# Altium PCB PCB1.PcbDoc
Units mm, origin at the board's own origin, x right, y up, seen from the top; angles counter-clockwise.
Board outline 152.4 x 101.6 mm, 2 copper layers (Top Layer, Bottom Layer); 31 components, 0 nets, 171 pads, 0 vias.
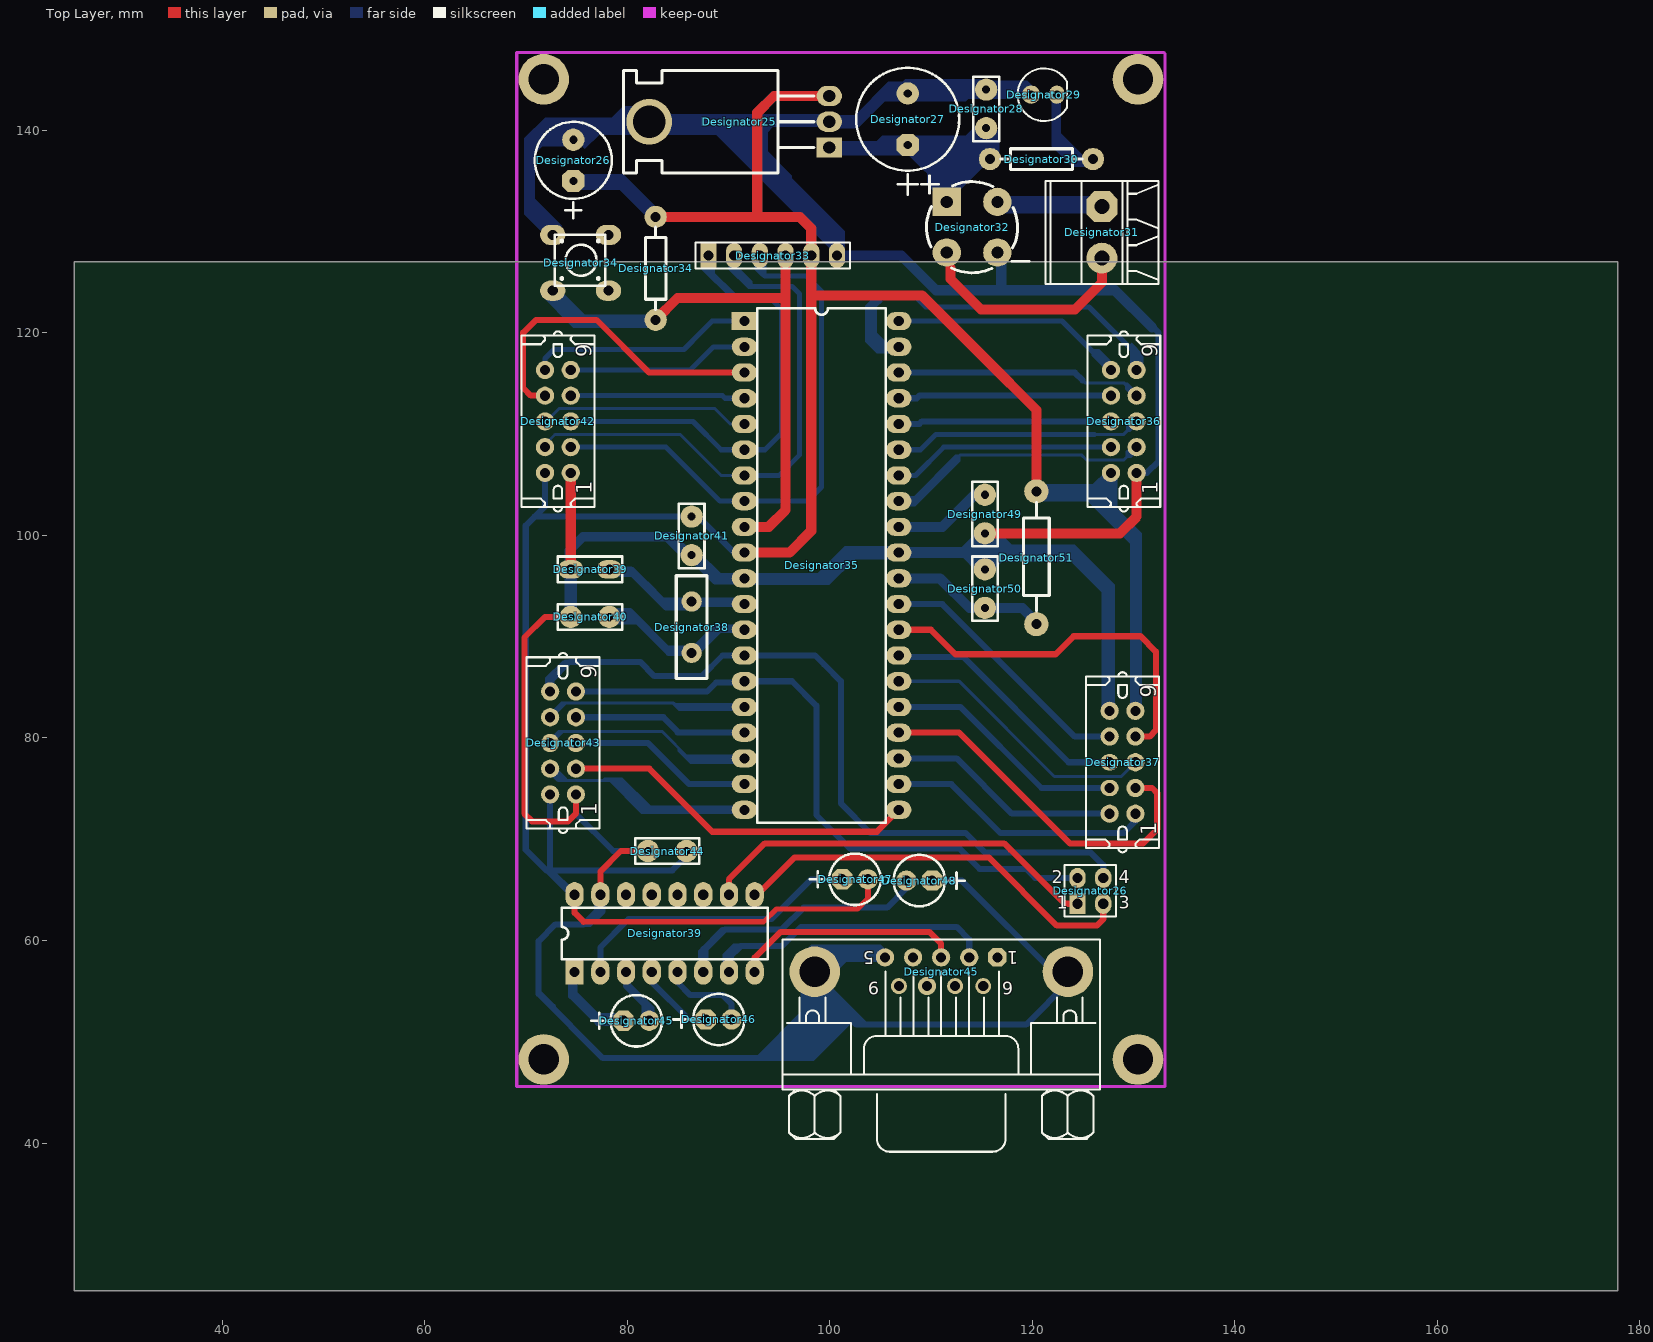
[diagram p0: Top Layer view]
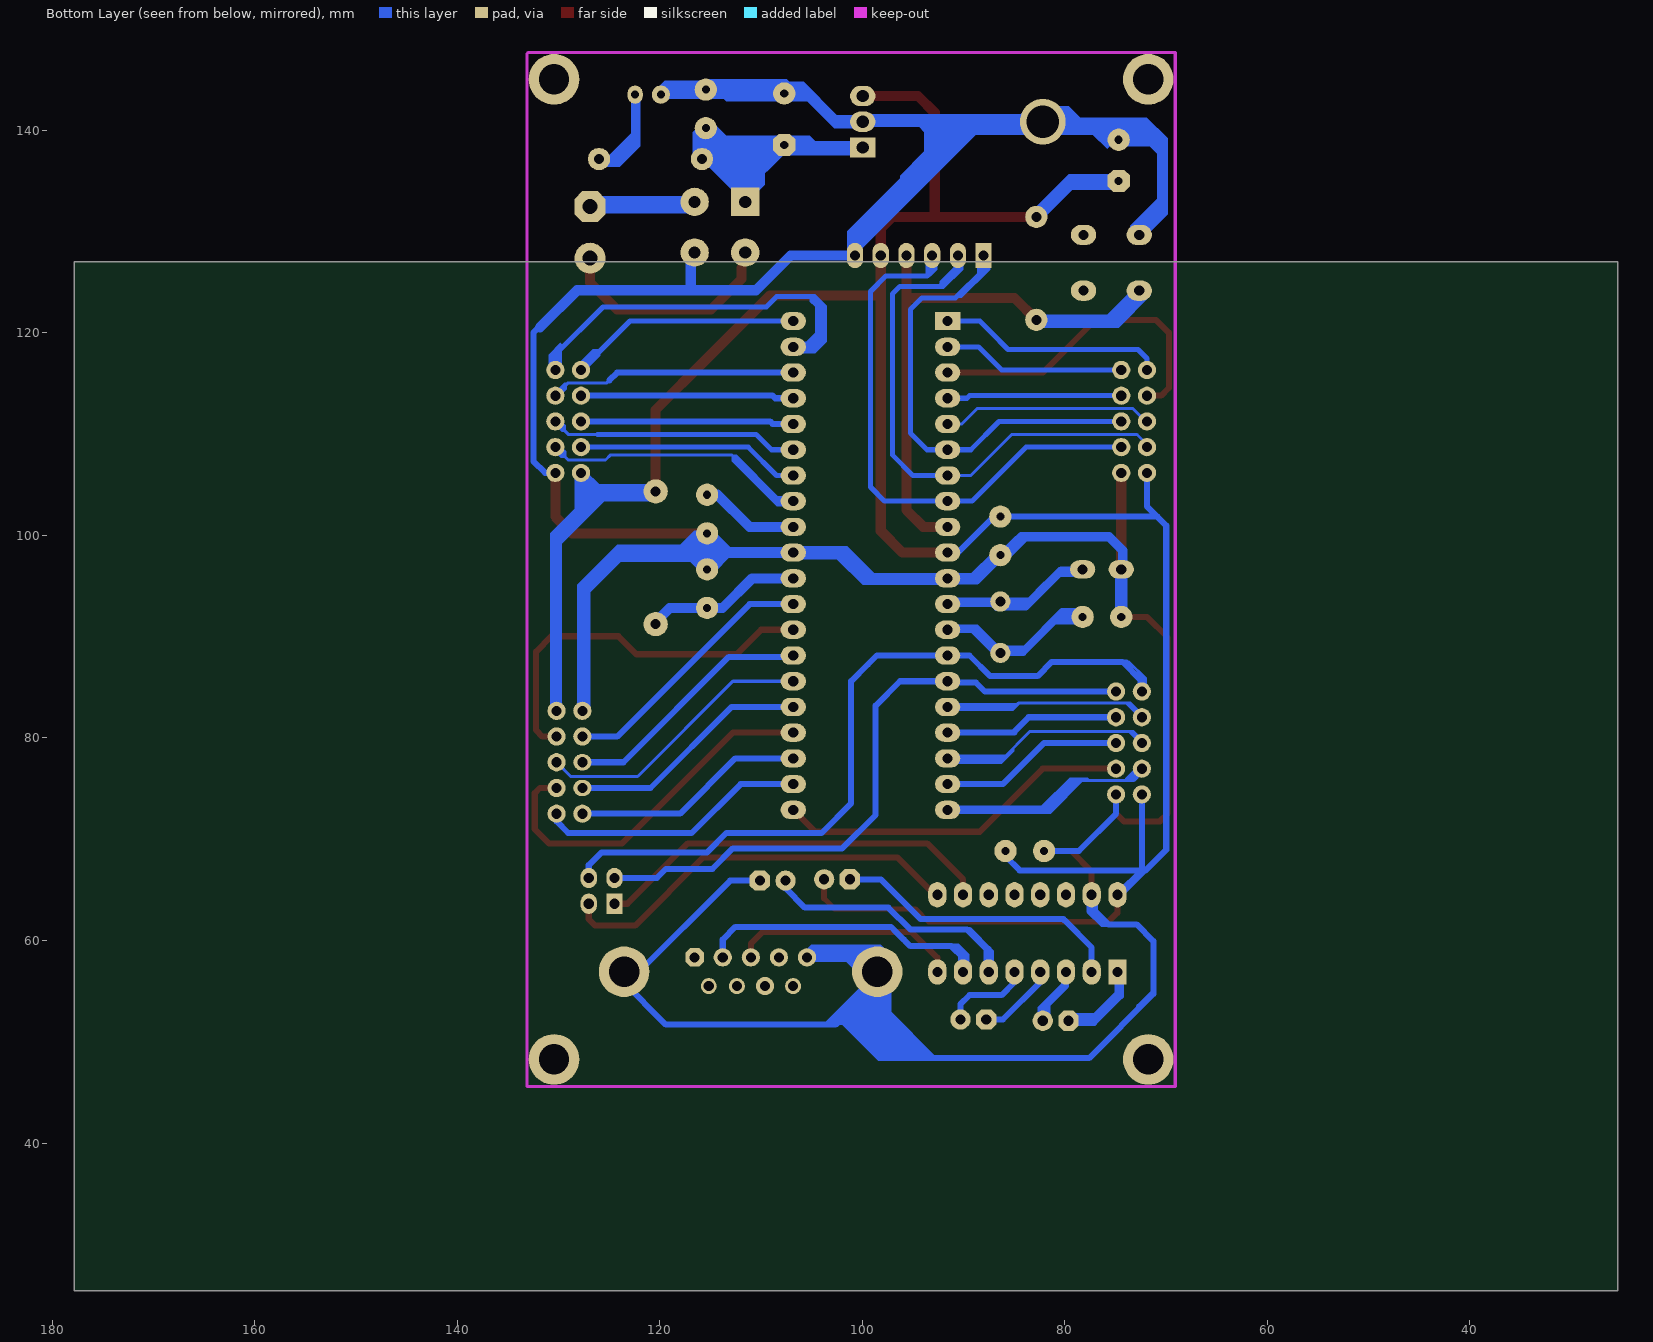
[diagram p1: Bottom Layer view, seen from below]

## Layer stack, top to bottom
Top Layer: signal copper 0.0356
Dielectric: dielectric 0.32, FR-4, Dk 4.8
Bottom Layer: signal copper 0.0356

## Board outline
25.4,25.4 177.8,25.4 177.8,127 25.4,127

## Design rules (kind name [scope] priority, off if disabled: settings)
Clearance [All] p1: gap=0.254
PolygonConnect [All] p1: connectstyle=Relief reliefconductorwidth=0.254 reliefentries=4 polygonreliefangle="90 Angle"
RoutingVias [All] p1: holewidth=0.711 width=1.27 viastyle="Through Hole" minholewidth=0.711 minwidth=1.27 maxholewidth=0.711 maxwidth=1.27
SilkscreenOverComponentPads SilkToSolderMaskClearance [IsPad] p1: minsilkscreentomaskgap=0.254
SolderMaskExpansion [All] p1: expansion=0.102
Width [All] p1: maxlimit=0.254 minlimit=0.254 preferedwidth=0.254
27 further rules are at their usual default settings.

## Components (designator, comment, footprint, x,y, rotation, side; value= is the part's Value field where it differs from the comment)
Designator25 "Comment" TO220HB 91.059,140.843 r90 top
Designator26 "Comment" RB.2/.3 74.676,137.033 r270 top
Designator26 "Comment" HDR2X2 124.46,63.627 r0 top
Designator27 "Comment" RB.2/.4 107.696,141.097 r270 top
Designator28 "Comment" RAD0.15#1 115.443,142.113 r270 top
Designator29 "Comment" LED-3 121.158,143.51 r0 top
Designator30 "Comment" AXIAL0.4 120.904,137.16 r0 top
Designator31 "Comment" MKDS3_2RMI 126.873,129.921 r270 top
Designator32 "Comment" BRIDGE-1 114.046,130.429 r0 top
Designator33 "Comment" HDR1X6 88.011,127.635 r0 top
Designator34 "Comment" sw4 72.644,129.667 r0 top
Designator34 "Comment" AXIAL0.4 82.804,126.365 r90 top
Designator35 "Comment" DIP40E 91.567,121.158 r0 top
Designator36 "Comment" BKLEV10#1 129.032,111.252 r90 top
Designator37 "Comment" BKLEV10#2 128.905,77.597 r90 top
Designator38 "Comment" XTAL1 86.36,88.392 r90 top
Designator39 "Comment" dip16e 74.803,56.896 r90 top
Designator39 "Comment" RAD0.15#2 76.327,96.647 r0 top
Designator40 "Comment" RAD0.15#1 76.327,91.948 r0 top
Designator41 "Comment" RAD0.15#1 86.36,99.949 r90 top
Designator42 "Comment" BKLEV10#1 73.152,111.252 r90 top
Designator43 "Comment" BKLEV10#1 73.66,79.502 r90 top
Designator44 "Comment" RAD0.15#1 83.947,68.834 r0 top
Designator45 "Comment" DB9FLW 116.544,58.335 r180 top
Designator45 "Comment" RB.1/.2 80.899,52.07 r180 top
Designator46 "Comment" RB.1/.2 89.027,52.197 r180 top
Designator47 "Comment" RB.1/.2 102.489,66.04 r180 top
Designator48 "Comment" RB.1/.2 108.839,65.913 r0 top
Designator49 "Comment" RAD0.15#1 115.316,102.108 r90 top
Designator50 "Comment" RAD0.15#1 115.316,94.742 r90 top
Designator51 "Comment" AXIAL0.5 120.396,97.79 r90 top

## Footprints (in the part's own frame and the unit in brackets; to place one, negate y for a bottom-side part, rotate by r counter-clockwise, add the part's x,y. Pads: shape width x height; smd on the part's side, far side on the other; paste and mask are expansions set on the pad)
AXIAL0.4 [mm]
  round 2.2 hole 1: 1(-5.08,0) 2(5.08,0)
  silkscreen extent -4.06,-1.02 4.06,1.02
AXIAL0.5 [mm]
  round 2.4 hole 1: 1(-6.55,0) 2(6.55,0)
  silkscreen extent -5.23,-1.27 5.43,1.27
BKLEV10#1 [mm]
  round 1.8 hole 1: 1(-5.08,-1.27) 2(-5.08,1.27) 3(-2.54,-1.27) 4(-2.54,1.27) 5(0,-1.27) 6(0,1.27) 7(2.54,-1.27) 8(2.54,1.27) 9(5.08,-1.27) 10(5.08,1.27)
  silkscreen extent -8.89,-3.6 8.89,3.6
BKLEV10#2 [mm]
  round 1.8 hole 1: 1(-5.08,-1.27) 2(-5.08,1.27) 3(-2.54,-1.27) 5(0,-1.27) 7(2.54,-1.27) 8(2.54,1.27) 9(5.08,-1.27) 10(5.08,1.27)
  oval 1.6x1.8 hole 1: 4(-2.54,1.27) 6(0,1.27)
  silkscreen extent -8.89,-3.6 8.89,3.6
BRIDGE-1 [mm] "created by: M.Hariri (designer)"
  round 2.8 hole 1.2: 1(2.5,-2.5) 2(-2.5,-2.5) 4(2.5,2.5)
  rect 2.8x2.8 hole 1.2: 3(-2.5,2.5)
  silkscreen extent -5,-4.5 5.64,5.07
DB9FLW [mm]
  oct 1.8x1.8 hole 1: 1(0,0)
  round 1.8 hole 1: 2(2.773,0) 3(5.546,0) 4(8.318,0) 5(11.091,0) 8(6.943,2.836)
  round 1.575 hole 1: 6(1.397,2.836) 7(4.17,2.836) 9(9.715,2.836)
  round 4.995 hole 3.006: BO1(-6.964,1.418) BO2(18.034,1.418)
  silkscreen extent -10.12,-1.76 21.21,19.2
dip16e [mm]
  rect 2.5x1.8 hole 1: 1(0,0)
  oval 2.5x1.8 hole 1: 2(0,-2.54) 3(0,-5.08) 4(0,-7.62) 5(0,-10.16) 6(0,-12.7) 7(0,-15.24) 8(0,-17.78) 9(7.62,-17.78) 10(7.62,-15.24) 11(7.62,-12.7) 12(7.62,-10.16) 13(7.62,-7.62) 14(7.62,-5.08) 15(7.62,-2.54) 16(7.62,0)
  silkscreen extent 1.27,-19.05 6.35,1.27
DIP40E [mm]
  rect 2.5x1.8 hole 1: 1(0,0)
  oval 2.5x1.8 hole 1: 2(0,-2.54) 3(0,-5.08) 4(0,-7.62) 5(0,-10.16) 6(0,-12.7) 7(0,-15.24) 8(0,-17.78) 9(0,-20.32) 10(0,-22.86) 11(0,-25.4) 12(0,-27.94) 13(0,-30.48) 14(0,-33.02) 15(0,-35.56) 16(0,-38.1) 17(0,-40.64) 18(0,-43.18) 19(0,-45.72) 20(0,-48.26) 21(15.24,-48.26) 22(15.24,-45.72) 23(15.24,-43.18) 24(15.24,-40.64) 25(15.24,-38.1) 26(15.24,-35.56) 27(15.24,-33.02) 28(15.24,-30.48) 29(15.24,-27.94) 30(15.24,-25.4) 31(15.24,-22.86) 32(15.24,-20.32) 33(15.24,-17.78) 34(15.24,-15.24) 35(15.24,-12.7) 36(15.24,-10.16) 37(15.24,-7.62) 38(15.24,-5.08) 39(15.24,-2.54) 40(15.24,0)
  silkscreen extent 1.27,-49.53 13.97,1.27
HDR1X6 [mm] "Connector; Header; 6 Position"
  rect 1.6x2.5 hole 1: 1(0,0)
  oval 1.6x2.5 hole 1: 2(2.54,0) 3(5.08,0) 4(7.62,0) 5(10.16,0) 6(12.7,0)
  silkscreen extent -1.27,-1.27 13.97,1.27
HDR2X2 [mm] "Connector; Header; 2x2 Position"
  rect 1.6x2 hole 1: 1(0,0)
  oval 1.6x2 hole 1: 2(0,2.54) 3(2.54,0) 4(2.54,2.54)
  silkscreen extent -1.27,-1.27 3.81,3.81
LED-3 [mm]
  round 1.8 hole 0.8: A(-1.279,0.009)
  oval 1.5x1.8 hole 0.8: K(1.261,0.009)
  silkscreen extent -2.61,-2.59 2.24,2.61
MKDS3_2RMI [mil]
  oct 120x120 hole 59.06: 1(-100,0)
  round 120 hole 59.06: 2(100,0)
  silkscreen extent -200,-220 200,220
RAD0.15#1 [mm]
  round 2.2 hole 0.8: 1(-1.905,0) 2(1.905,0)
  silkscreen extent -3.18,-1.27 3.18,1.27
RAD0.15#2 [mm]
  oval 2.5x1.8 hole 1: 1(-1.905,0) 2(1.905,0)
  silkscreen extent -3.17,-1.27 3.17,1.27
RB.1/.2 [mm]
  oct 2x2 hole 1: 1(1.27,0)
  round 2 hole 1: 2(-1.27,0)
  silkscreen extent -2.54,-2.54 4.47,2.54
RB.2/.3 [mm]
  oct 2.2x2.2 hole 0.8: 1(2.032,0)
  round 2.2 hole 0.8: 2(-2.032,0)
  silkscreen extent -3.8,-3.8 5.73,3.8
RB.2/.4 [mm]
  oct 2.2x2.2 hole 0.8: 1(2.54,0)
  round 2.2 hole 0.8: 2(-2.54,0)
  silkscreen extent -5.08,-5.08 7.44,5.08
sw4 [mm]
  oval 2.5x2 hole 1: 1(0,0) 2(5.5,0) 3(0,-5.5) 4(5.5,-5.5)
  silkscreen extent 0.2,-5 5.2,0
TO220HB [mm]
  round 4.5 hole 3.2: 0(0,8.89)
  rect 2x2.5 hole 1.2: 1(-2.54,-8.89)
  oval 2x2.5 hole 1.2: 2(0,-8.89) 3(2.54,-8.89)
  silkscreen extent -5.08,-7.37 5.08,11.43
XTAL1 [mm]
  round 2 hole 1: 1(0,0) 2(5.08,0)
  silkscreen extent -2.54,-1.52 7.62,1.52

## Free pads (board coordinates)
  round 5 hole 3: 6(71.755,48.26) 6(71.755,145.034) 6(130.429,48.26) 6(130.429,145.034)

## Nets (pads, with @x,y where several pads share a name; then routed paths per layer and width w, separated by ;. In a path a pad name is that pad's centre, name@x,y a point inside that pad or via, vN(x,y) a via of type N, cw(c..) or ccw(c..) an arc to the next point about the centre after c; other vN are vias at no path point)
pads on no net: Designator25.0 Designator25.1 Designator25.2 Designator25.3 Designator26.1 Designator26.2 Designator26.3 Designator26.4 Designator27.1 Designator27.2 Designator28.1 Designator28.2 Designator29.A Designator29.K Designator30.1 Designator30.2 Designator31.1 Designator31.2 Designator32.1 Designator32.2 Designator32.3 Designator32.4 Designator33.1 Designator33.2 Designator33.3 Designator33.4 Designator33.5 Designator33.6 Designator34.1 Designator34.2 Designator34.3 Designator34.4 Designator35.1 Designator35.2 Designator35.3 Designator35.4 Designator35.5 Designator35.6 Designator35.7 Designator35.8 Designator35.9 Designator35.10 Designator35.11 Designator35.12 Designator35.13 Designator35.14 Designator35.15 Designator35.16 Designator35.17 Designator35.18 Designator35.19 Designator35.20 Designator35.21 Designator35.22 Designator35.23 Designator35.24 Designator35.25 Designator35.26 Designator35.27 Designator35.28 Designator35.29 Designator35.30 Designator35.31 Designator35.32 Designator35.33 Designator35.34 Designator35.35 Designator35.36 Designator35.37 Designator35.38 Designator35.39 Designator35.40 Designator36.1 Designator36.2 Designator36.3 Designator36.4 Designator36.5 Designator36.6 Designator36.7 Designator36.8 Designator36.9 Designator36.10 Designator37.1 Designator37.2 Designator37.3 Designator37.4 Designator37.5 Designator37.6 Designator37.7 Designator37.8 Designator37.9 Designator37.10 Designator38.1 Designator38.2 Designator39.1 Designator39.2 Designator39.3 Designator39.4 Designator39.5 Designator39.6 Designator39.7 Designator39.8 Designator39.9 Designator39.10 Designator39.11 Designator39.12 Designator39.13 Designator39.14 Designator39.15 Designator39.16 Designator40.1 Designator40.2 Designator41.1 Designator41.2 Designator42.1 Designator42.2 Designator42.3 Designator42.4 Designator42.5 Designator42.6 Designator42.7 Designator42.8 Designator42.9 Designator42.10 Designator43.1 Designator43.2 Designator43.3 Designator43.4 Designator43.5 Designator43.6 Designator43.7 Designator43.8 Designator43.9 Designator43.10 Designator44.1 Designator44.2 Designator45.1 Designator45.2 Designator45.3 Designator45.4 Designator45.5 Designator45.6 Designator45.7 Designator45.8 Designator45.9 Designator45.BO1 Designator45.BO2 Designator46.1 Designator46.2 Designator47.1 Designator47.2 Designator48.1 Designator48.2 Designator49.1 Designator49.2 Designator50.1 Designator50.2 Designator51.1 Designator51.2
copper on no net: | length 2307.1
  Top Layer w0.5: 75.692,61.849 93.472,61.849 94.742,63.119 102.489,63.119 ; 95.504,63.119 102.743,63.119 103.759,64.135 103.759,66.04
  Top Layer w0.6: 71.882,113.792 70.485,113.792 69.723,114.554 69.723,120.015 70.993,121.285 76.962,121.285 82.169,116.078 91.567,116.078 ; 74.422,91.948 71.882,91.948 69.85,89.916 69.85,73.025 69.85,72.517 70.612,71.755 72.136,71.755 74.168,71.755 74.93,72.517 74.93,74.422 ; 74.803,64.516 74.803,62.738 75.692,61.849 ; 74.93,76.962 82.169,76.962 88.392,70.739 104.648,70.739 ; 77.343,64.516 77.343,66.802 79.375,68.834 82.042,68.834 ; 90.043,65.532 90.043,64.516 90.043,66.04 93.599,69.596 117.221,69.596 117.856,68.961 ; 92.583,56.896 92.583,58.293 95.123,60.833 109.855,60.833 110.977,59.711 110.977,58.843 ; 92.583,64.516 92.837,64.516 96.52,68.199 115.697,68.199 122.428,61.468 126.365,61.468 127,62.103 127,63.627 ; 103.759,64.135 103.759,66.04 ; 106.807,80.518 112.776,80.518 123.698,69.596 130.937,69.596 132.334,70.993 132.334,74.549 131.826,75.057 130.175,75.057 ; 106.807,90.678 109.982,90.678 112.395,88.265 117.221,88.265 122.301,88.265 124.079,90.043 130.683,90.043 132.207,88.519 132.207,80.772 131.572,80.137 130.175,80.137 ; 117.602,69.215 123.19,63.627 124.46,63.627 ; 104.648,70.739 106.807,72.898 104.648,70.739
  Top Layer w1: 74.422,96.647 74.422,106.172 ; 82.804,121.285 84.963,123.444 95.631,123.444 ; 82.804,131.445 96.52,131.445 ; 91.567,98.298 96.012,98.298 98.171,100.457 98.171,104.267 98.171,125.73 98.171,129.921 98.171,130.302 97.028,131.445 96.139,131.445 ; 91.567,100.838 93.98,100.838 95.631,102.489 95.631,125.73 ; 92.837,131.572 92.837,135.255 92.837,138.938 ; 92.837,138.303 92.837,141.732 94.488,143.383 99.949,143.383 ; 95.631,126.746 95.631,123.444 ; 95.631,127.635 95.631,123.444 ; 98.171,122.682 98.171,128.651 ; 98.171,129.667 98.171,123.698 109.093,123.698 113.284,119.507 ; 111.927,126.405 111.927,125.309 114.935,122.301 124.206,122.301 126.873,124.968 126.873,127.381 ; 113.03,119.761 115.697,117.094 ; 115.316,100.203 128.397,100.203 128.651,100.203 130.302,101.854 130.302,102.743 ; 115.443,117.348 120.269,112.522 ; 120.396,104.013 120.396,112.395 ; 130.302,102.108 130.302,103.378 ; 130.302,102.235 130.302,106.172
  Bottom Layer w0.3: 71.882,108.966 72.771,109.855 72.898,109.982 85.217,109.982 89.281,105.918 91.567,105.918 ; 71.882,111.252 72.009,111.252 73.279,112.522 88.646,112.522 90.17,110.998 91.567,110.998 ; 72.009,84.455 72.009,85.852 73.66,87.503 74.676,87.503 ; 72.263,77.47 72.263,77.597 ; 72.39,76.962 73.533,75.819 ; 72.39,79.375 73.66,80.645 73.787,80.645 ; 72.39,79.502 72.39,79.756 73.279,80.645 83.439,80.645 86.106,77.978 91.567,77.978 ; 72.39,82.042 72.39,82.296 73.533,83.439 84.582,83.439 84.963,83.058 91.567,83.058 89.662,83.058 ; 72.517,76.454 73.152,75.819 73.533,75.819 ; 72.644,84.709 72.644,85.852 72.929,86.137 ; 72.771,82.296 73.914,83.439 74.168,83.439 ; 73.025,76.454 73.66,75.819 73.914,75.819 73.914,75.946 73.025,76.835 ; 91.567,72.898 81.661,72.898 78.74,75.819 73.533,75.819 ; 106.807,85.598 112.776,85.598 122.174,76.2 128.778,76.2 130.175,77.597 130.175,77.089 ; 106.807,103.378 108.331,103.378 112.903,107.95 124.841,107.95 125.349,107.442 129.032,107.442 130.302,108.712 ; 123.698,109.982 129.032,109.982 130.302,111.252 ; 124.206,116.078 125.222,115.062 129.032,115.062 130.302,113.792 129.159,114.935
  Bottom Layer w0.5: 71.742,67.196 74.422,64.516 74.422,64.262 ; 71.882,108.712 71.882,108.966 ; 71.882,116.078 71.882,117.475 ; 71.882,116.332 71.882,117.475 ; 73.406,86.995 73.914,87.503 75.692,87.503 ; 74.041,91.948 74.041,98.552 75.565,100.076 84.328,100.076 86.36,98.044 ; 74.422,56.261 74.422,54.483 77.089,51.816 78.994,51.816 ; 74.422,97.282 74.803,96.901 74.803,92.456 ; 74.422,108.712 83.82,108.712 89.154,103.378 91.567,103.378 ; 74.422,111.252 86.487,111.252 89.281,108.458 91.567,108.458 93.599,108.458 95.25,110.109 95.25,122.301 94.107,123.444 90.805,123.444 88.011,126.238 88.011,127.635 ; 74.422,113.792 89.408,113.792 89.662,113.538 91.567,113.538 ; 74.422,116.332 86.233,116.332 88.519,118.618 91.567,118.618 ; 75.692,61.595 76.327,61.595 77.597,62.865 77.597,64.262 ; 76.454,52.578 78.359,52.578 ; 76.454,62.357 76.962,62.865 76.962,64.262 ; 77.343,52.578 79.502,52.578 ; 78.105,92.583 80.264,92.583 83.947,88.9 86.614,88.9 88.646,90.932 91.313,90.932 ; 78.359,91.44 81.026,91.44 81.654,90.812 ; 78.733,92.322 80.525,92.322 ; 78.74,96.139 80.518,96.139 83.82,92.837 86.106,92.837 ; 80.137,56.261 80.137,55.626 82.423,53.34 82.423,52.324 ; 81.661,52.451 81.661,53.721 ; 81.915,95.25 83.566,93.599 91.44,93.599 ; 83.693,99.695 84.328,99.695 88.646,95.377 91.44,95.377 ; 83.82,99.695 85.598,97.917 85.979,97.917 ; 86.741,119.507 88.392,121.158 91.567,121.158 ; 86.868,98.298 89.154,96.012 91.313,96.012 ; 87.249,57.277 87.249,58.928 ; 87.249,58.547 87.249,58.928 ; 87.306,120.072 85.598,118.364 72.771,118.364 71.882,117.475 ; 87.503,59.182 87.249,58.928 ; 87.757,57.658 87.757,59.182 87.938,59.363 ; 89.662,57.277 89.662,58.547 90.551,59.436 91.44,59.436 ; 90.043,61.087 89.408,61.087 87.249,58.928 ; 90.297,57.277 90.297,58.547 90.456,58.706 ; 90.551,126.746 90.551,126.365 ; 90.551,127.635 90.551,126.365 ; 91.567,95.758 99.441,95.758 101.981,98.298 106.807,98.298 ; 93.091,127.635 93.091,126.111 93.599,125.603 97.663,125.603 99.187,124.079 99.187,104.775 97.79,103.378 96.139,103.378 ; 93.98,105.918 91.567,105.918 94.996,105.918 97.028,107.95 97.028,123.825 96.266,124.587 92.329,124.587 90.551,126.365 ; 104.14,121.793 104.14,119.507 ; 106.807,100.838 109.22,100.838 ; 106.807,105.918 108.458,105.918 111.252,108.712 127.762,108.712 ; 106.807,108.458 108.966,108.458 110.49,109.982 126.111,109.982 ; 106.807,118.618 105.029,118.618 104.14,119.507 ; 106.807,121.158 122.936,121.158 127.762,116.332 ; 115.316,96.647 115.316,100.203 ; 115.824,98.298 106.807,98.298 ; 120.396,104.013 127.635,104.013 ; 127.635,82.677 127.635,94.488 123.825,98.298 106.807,98.298 ; 127.762,106.172 127.762,102.108 130.175,99.695 130.175,82.677 ; 130.302,116.332 130.302,117.856 125.603,122.555 109.474,122.555 108.458,123.571 105.029,123.571 104.14,122.682 104.14,119.507 ; 91.567,103.378 96.52,103.378 91.567,103.378
  Bottom Layer w0.6: 70.866,101.854 87.122,101.854 ; 71.247,55.88 71.247,54.737 77.597,48.387 93.472,48.387 98.51,53.425 98.51,56.917 ; 71.882,106.172 71.882,102.87 69.977,100.965 69.977,68.961 72.009,66.929 72.39,66.929 ; 72.263,67.056 74.803,64.516 74.422,64.516 ; 72.39,74.422 72.39,66.929 ; 72.39,84.582 72.39,85.598 74.295,87.503 81.28,87.503 82.677,86.106 87.376,86.106 89.408,88.138 ; 72.517,66.802 72.39,66.929 ; 72.644,53.467 71.247,54.864 71.247,59.944 72.898,61.595 75.692,61.595 77.343,63.246 77.343,64.516 ; 72.644,124.167 75.526,121.285 82.804,121.285 ; 72.644,129.667 72.644,130.302 70.104,132.842 70.104,138.303 70.866,139.065 74.676,139.065 76.454,140.843 99.949,140.843 102.616,140.843 105.41,143.637 115.062,143.637 115.443,144.018 119.38,144.018 119.879,143.519 ; 74.422,91.948 74.422,98.425 75.692,99.695 84.709,99.695 88.646,95.758 91.44,95.758 ; 74.676,135.001 79.248,135.001 82.804,131.445 ; 74.803,56.896 74.803,54.737 77.47,52.07 79.629,52.07 ; 74.93,73.533 74.93,74.422 74.93,72.517 78.613,68.834 82.042,68.834 79.629,68.834 ; 74.93,79.502 82.042,79.502 86.106,75.438 91.567,75.438 87.757,75.438 ; 74.93,82.042 82.423,82.042 ; 74.93,84.582 87.884,84.582 ; 76.835,84.582 87.884,84.582 ; 77.343,56.896 77.343,59.309 80.01,61.976 80.137,62.103 94.234,62.103 98.171,66.04 101.473,66.04 ; 78.232,96.52 78.232,96.647 ; 79.883,56.896 79.883,55.499 82.169,53.213 82.169,52.07 ; 80.391,91.948 78.232,91.948 80.518,91.948 84.074,88.392 86.36,88.392 88.646,90.678 91.567,90.678 ; 81.661,82.042 83.566,82.042 85.09,80.518 91.567,80.518 84.963,80.518 ; 82.423,56.896 82.423,55.88 86.106,52.197 87.376,52.197 ; 84.963,56.896 84.963,55.88 86.233,54.61 89.408,54.61 90.297,53.721 90.297,52.197 ; 85.852,68.834 85.852,68.326 84.455,66.929 72.39,66.929 ; 86.233,87.757 89.154,90.678 91.567,90.678 ; 86.36,92.837 86.741,93.218 91.567,93.218 ; 86.36,101.854 86.995,101.854 90.551,98.298 ; 86.741,92.837 87.122,93.218 ; 87.503,56.896 87.503,58.928 89.662,61.087 95.25,61.087 97.409,63.246 105.664,63.246 107.569,65.151 107.569,65.913 ; 88.773,100.076 90.551,98.298 ; 89.408,95.758 91.567,95.758 ; 89.662,90.678 91.567,90.678 ; 89.789,85.471 91.694,85.471 88.773,85.471 87.884,84.582 ; 90.043,56.896 90.043,58.293 91.186,59.436 95.25,59.436 96.266,60.452 ; 90.17,88.138 91.567,88.138 ; 91.567,85.598 96.266,85.598 98.679,83.185 98.679,72.39 101.981,69.088 112.776,69.088 114.808,67.056 119.38,67.056 120.269,66.167 124.46,66.167 ; 93.091,140.716 93.091,137.16 100.711,129.54 ; 95.885,60.071 96.647,60.833 97.155,61.341 103.886,61.341 ; 97.917,56.388 102.616,51.689 119.38,51.689 123.698,56.007 123.698,56.896 123.063,56.896 ; 98.51,56.092 98.51,56.917 ; 99.568,66.04 101.219,66.04 ; 99.949,138.303 105.156,138.303 105.41,138.557 107.696,138.557 109.093,137.16 115.824,137.16 115.443,137.541 115.443,140.208 ; 103.505,61.341 112.522,61.341 113.771,60.092 113.771,58.335 ; 105.452,58.335 99.928,58.335 98.51,56.917 ; 106.807,75.438 112.014,75.438 116.84,70.612 129.032,70.612 130.175,71.755 130.175,72.517 ; 106.807,77.978 112.522,77.978 117.983,72.517 127.635,72.517 ; 106.807,83.058 112.903,83.058 120.904,75.057 127.635,75.057 ; 106.807,93.218 111.125,93.218 124.206,80.137 127.635,80.137 ; 106.807,110.998 108.839,110.998 109.093,111.252 127.762,111.252 ; 106.807,113.538 108.585,113.538 108.839,113.792 127.762,113.792 ; 106.807,116.078 124.206,116.078 124.968,115.316 ; 106.934,88.011 113.157,88.011 123.571,77.597 127.635,77.597 ; 111.546,132.929 111.546,136.866 ; 112.649,65.913 110.109,65.913 113.03,65.913 122.301,56.642 ; 122.419,143.519 122.419,138.947 124.206,137.16 125.984,137.16 ; 127,66.167 127,67.437 125.73,68.707 115.316,68.707 113.411,70.612 104.013,70.612 101.092,73.533 101.092,85.598 99.441,87.249 98.552,88.138 91.567,88.138 ; 129.921,122.555 132.461,120.015 132.461,107.315 131.318,106.172 130.302,106.172 ; 78.232,96.647 80.391,96.647 ; 78.232,96.647 80.391,96.647 ; 80.391,96.647 83.82,93.218 86.614,93.218 91.567,93.218 ; 87.122,93.218 91.567,93.218 ; 87.122,93.218 91.567,93.218 ; 89.408,88.138 91.567,88.138 ; 89.408,88.138 91.567,88.138 ; 90.551,98.298 91.567,98.298 90.551,98.298
  Bottom Layer w1: 99.06,131.191 100.711,129.54 ; 100.021,130.23 100.711,129.54 ; 106.807,95.758 110.871,95.758 113.792,92.837 115.316,92.837 118.999,92.837 120.65,91.186 ; 106.807,100.838 111.125,100.838 114.3,104.013 115.316,104.013 ; 111.76,124.206 110.49,124.206 107.061,127.635 100.711,127.635 100.711,129.54 ; 112.014,124.206 110.998,124.206 128.143,124.206 131.826,120.523 ; 116.332,127.889 116.927,127.294 116.927,124.333 ; 116.546,132.929 126.405,132.929 126.873,132.461

## Keep-outs
Keep-Out Layer:
  lines w0.3: 69.088,45.593 133.096,45.593 133.096,140.97 133.096,147.574 132.969,147.701 132.207,147.701 69.088,147.701 69.088,45.593

## Other copper
Bottom Layer:
  region: 109.601,136.398 109.601,134.62 110.744,133.477 112.395,135.128
  region: 74.803,134.112 79.248,134.112 82.169,131.191 82.423,131.191 82.423,131.699 83.058,132.334 82.931,132.334 79.629,135.636 75.438,135.636
  region: 107.061,103.886 108.331,103.886 112.395,107.95 112.903,107.95 112.903,107.315 108.458,102.87 107.442,102.87
  region: 120.904,105.029 125.984,105.029 127.254,106.299 127.381,106.172 128.143,106.172 128.397,105.918 128.397,102.616 130.81,100.203 130.81,82.931 130.556,82.677 130.302,82.931 129.667,82.931 129.667,99.187 125.476,103.378 120.523,103.378
  region: 129.667,108.712 129.243,108.288 129.243,107.653 129.751,107.653 130.175,108.077
  region: 129.667,111.252 129.292,110.877 129.292,110.242 129.673,110.242 130.175,110.744
  region: 128.778,115.062 129.413,115.062 130.302,114.173 129.921,113.792 129.794,113.792 129.159,114.427 129.159,114.935
  region: 128.016,116.967 126.619,118.364 125.857,118.364 125.857,117.729 127.127,116.459 127.127,116.332
  region: 130.937,116.713 130.937,117.856 129.794,118.999 129.667,118.872 129.667,116.586
  region: 106.172,117.983 104.648,117.983 103.505,119.126 103.505,122.682 104.648,123.825 105.156,123.825 105.156,123.063 104.648,122.555 104.648,120.015 105.537,119.126 107.188,119.126
  region: 116.84,131.826 126.873,131.826 127,131.953 126.746,132.207 126.746,133.477 117.602,133.477 117.094,133.985
  region: 121.92,143.256 121.92,138.43 123.952,136.398 126.238,136.398 126.238,136.906 125.984,137.16 125.349,137.16 122.809,139.7 122.809,143.002
  region: 100.33,137.541 109.347,137.541 109.347,139.446 105.156,139.446 104.648,138.938 100.711,138.938
  region: 107.95,139.446 113.411,139.446 114.681,140.716 114.808,140.589 115.951,140.589 116.713,139.827 116.713,137.16 116.459,137.16 115.824,136.525 115.316,136.525 111.72,132.929 111.546,132.929 111.546,133.818 107.315,138.049
  region: 115.824,144.907 119.507,144.907 120.142,144.272 120.142,143.129 115.697,143.129
  region: 115.443,143.383 119.38,143.383 119.888,142.875 120.142,143.129 120.142,144.272 116.459,144.272 115.697,145.034
  region: 100.711,140.208 102.743,140.208 105.41,142.875 113.411,142.875 113.665,143.129 115.697,143.129 115.697,145.034 107.442,145.034 107.188,144.78 105.791,144.78 102.489,141.478 100.457,141.478
  region: 82.55,139.573 88.773,139.573 100.33,128.016 100.33,127.508 101.346,127.508 101.473,127.635 101.473,130.048 96.266,135.255 96.266,135.509 93.853,137.922 93.853,139.827 94.361,140.335 99.441,140.335 99.441,141.224 99.568,141.351 99.314,141.605 84.328,141.605 83.566,142.367
  region: 72.136,129.413 69.85,131.699 69.85,139.192 71.882,141.224 78.486,141.224 79.629,142.367 82.677,142.367 82.677,140.462 81.788,139.573 77.216,139.573 75.819,138.176 75.565,138.43 71.628,138.43 70.866,137.668 70.866,133.223 73.533,130.556 73.533,129.667
  region: 71.501,123.698 74.676,120.523 82.931,120.523 82.931,121.539 83.058,121.666 82.931,121.793 75.819,121.793 73.406,124.206
  region: 92.583,127.127 92.583,126.238 93.218,125.603 93.726,125.603 93.726,126.746 93.345,127.127
  region: 90.043,127.127 90.043,126.238 91.948,124.333 92.329,124.333 92.329,125.095 90.805,126.619 90.805,127.381
  region: 87.376,126.873 87.376,126.238 90.17,123.444 90.805,123.444 88.646,125.603 88.646,127 88.392,127.254
  region: 91.059,82.677 85.09,82.677 84.328,83.439 90.805,83.439 90.932,83.566
  region: 91.186,77.47 86.233,77.47 85.008,78.695 85.008,79.076 85.725,78.359 90.805,78.359
  region: 91.186,72.517 81.407,72.517 78.105,75.819 77.47,75.819 77.724,76.073 79.502,76.073 82.296,73.279 90.805,73.279
  region: 86.995,48.641 92.837,48.641 97.155,52.959 97.155,56.261 99.314,56.261 103.886,51.689 101.981,51.689 98.425,48.133 92.71,48.133
  region: 96.901,58.293 98.171,59.563 105.029,59.563 105.791,58.801 105.791,57.912 101.6,57.912 100.203,56.515
  region: 92.075,96.266 98.806,96.266 101.473,98.933 106.68,98.933 106.68,97.917 106.426,97.663 102.489,97.663 99.949,95.123 91.948,95.123
  region: 107.188,98.806 113.03,98.806 114.681,100.457 116.586,100.457 117.983,99.06 124.206,99.06 128.143,95.123 128.143,82.677 128.016,82.55 127.762,82.804 126.873,82.804 126.873,94.361 123.825,97.409 116.967,97.409 115.824,96.266 115.57,96.52 114.427,96.52 113.157,97.79 107.188,97.79

## Text inside footprints (layer, text, board x,y; h text height)
Designator26: Top Overlay "3" at 128.524,63.119 h1.27; Top Overlay "4" at 128.524,65.659 h1.27; Top Overlay "2" at 121.92,65.659 h1.27; Top Overlay "1" at 122.428,63.119 h1.27
Designator36: Top Overlay "9" at 132.359,117.602 h1.52 r90; Top Overlay "1" at 132.385,104.064 h1.52 r90
Designator37: Top Overlay "9" at 132.232,83.947 h1.52 r90; Top Overlay "1" at 132.258,70.409 h1.52 r90
Designator42: Top Overlay "9" at 76.479,117.602 h1.52 r90; Top Overlay "1" at 76.505,104.064 h1.52 r90
Designator43: Top Overlay "9" at 76.987,85.852 h1.52 r90; Top Overlay "1" at 77.013,72.314 h1.52 r90
Designator45: Top Overlay "6" at 118.11,55.901 h1.27 r180; Top Overlay "1" at 118.618,58.949 h1.27 r180; Top Overlay "5" at 104.394,58.949 h1.27 r180; Top Overlay "9" at 104.902,55.901 h1.27 r180